# Altium PCB PCB.PcbDoc
Units mil, origin at the board's own origin, x right, y up, seen from the top; angles counter-clockwise.
Board outline 6000 x 4000 mil, 2 copper layers (Top Layer, Bottom Layer); 31 components, 41 nets, 131 pads, 0 vias.
Unrouted connection lines stored in the file: 86.
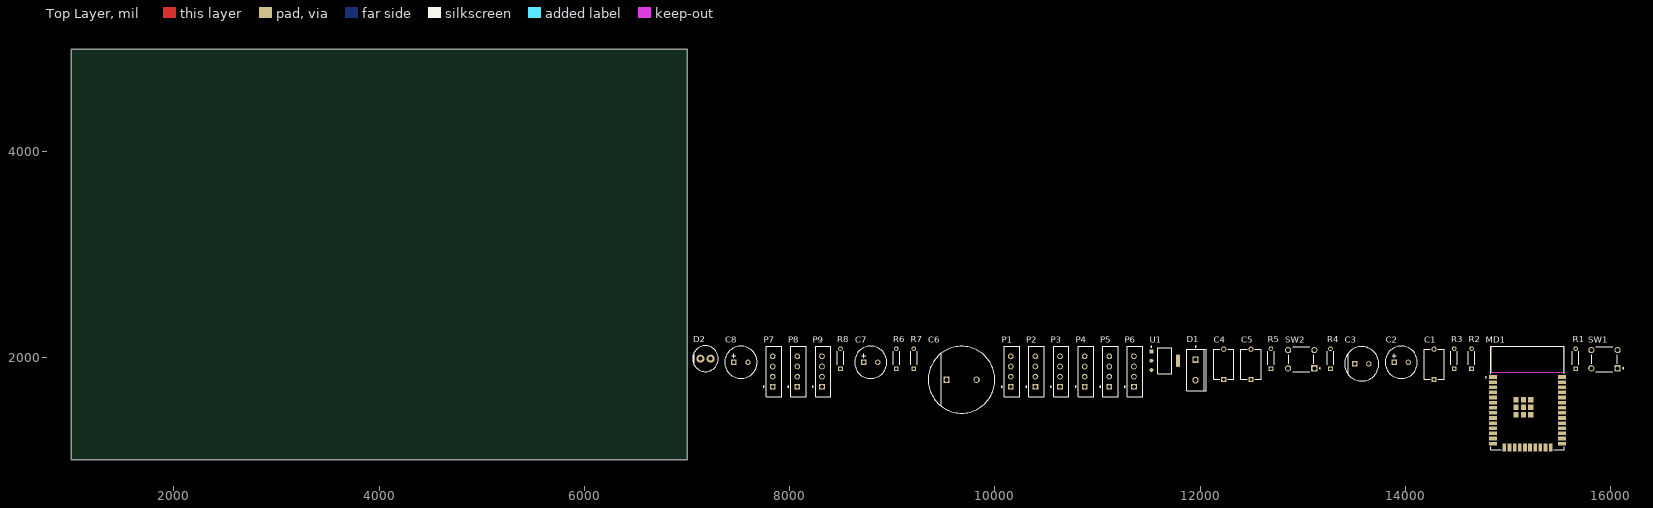
[diagram p0: Top Layer view]
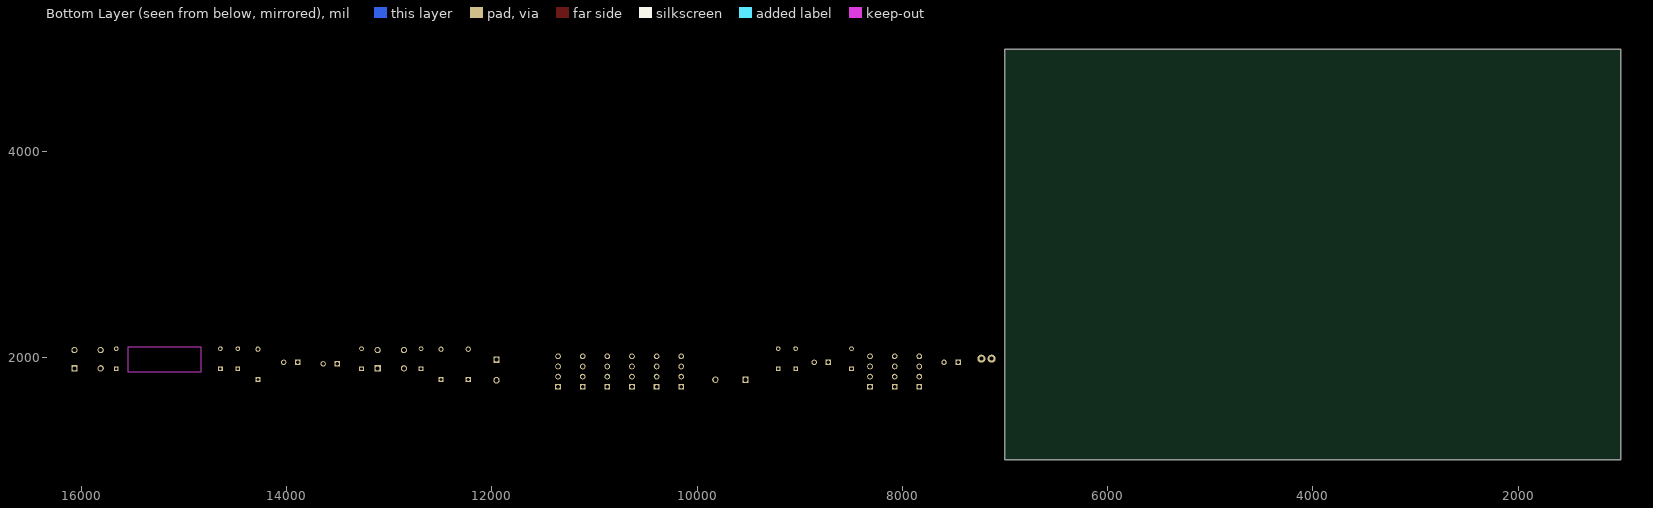
[diagram p1: Bottom Layer view, seen from below]

## Layer stack, top to bottom
Top Solder: solder mask 0.4, Solder Resist, Dk 3.5
Top Layer: signal copper 1.4
Dielectric 1: dielectric 12.6, FR-4, Dk 4.8
Bottom Layer: signal copper 1.4
Bottom Solder: solder mask 0.4, Solder Resist, Dk 3.5

## Board outline
1000,1000 7000,1000 7000,5000 1000,5000

## Design rules (kind name [scope] priority, off if disabled: settings)
Clearance [All] p1: gap=10 ignorepadtopadclearanceinfootprint=FALSE except(0: Arc-Hole Track-Hole SMDPad-Hole THPad-Hole Via-Hole Fill-Hole Poly-Hole Region-Hole Text-Hole)
PolygonConnect [All] p1: connectstyle=Relief reliefconductorwidth=10 reliefentries=4 polygonreliefangle="90 Angle" airgapwidth=10
RoomDefinition MCU [InComponentClass('MCU')] p1: confinementstyle=ConfineIn formatcopy=TRUE lockcomponents=FALSE outline 7045,1065 16140,1065 16140,2220 7045,2220
RoutingVias [All] p1: holewidth=28 width=50 viastyle="Through Hole" minholewidth=28 minwidth=50 maxholewidth=28 maxwidth=50
SolderMaskExpansion [All] p1: expansion=4 istentingtop=FALSE
Width [All] p1: maxlimit=10 minlimit=10 preferedwidth=10
30 further rules are at their usual default settings.

## Components (designator, comment, footprint, x,y, rotation, side; value= is the part's Value field where it differs from the comment)
C1 "1nF" FP-VY2102M29Y5US6TV7-MFG 14280,1930 r90 top
C2 "100uF" NIC-RNS-8x11.5-2_V 13960,1950 r0 top
C3 "1uF" FP-ECA-2WHG010-MFG 13575,1935 r0 top
C4 "1nF" FP-VY2102M29Y5US6TV7-MFG 12230,1930 r90 top
C5 "1nF" FP-VY2102M29Y5US6TV7-MFG 12495,1930 r90 top
C6 "22uF" FP-RAD-TH-D_16_0_5-L_20_2-MFG 9675,1780 r0 top
C7 "10uF" NIC-RNS-8x11.5-2_V 8790,1950 r0 top
C8 "10uF" NIC-RNS-8x11.5-2_V 7525,1950 r0 top
D1 "BYW80-200G" ONSC-TO-220-2-221B-04_E 11955,1875 r0 top
D2 "SFH 4550" FP-SFH_4550-MFG 7180,1985 r0 top
MD1 "ESP32-WROOM-32D" FP-ESP32-WROOM-32D-MFG 15190,1600 r0 top
P1 "B4B-EH-A(LF)(SN)" JST-B4B-EH-A_V 10155,1860 r90 top
P2 "B4B-EH-A(LF)(SN)" JST-B4B-EH-A_V 10395,1860 r90 top
P3 "B4B-EH-A(LF)(SN)" JST-B4B-EH-A_V 10635,1860 r90 top
P4 "B4B-EH-A(LF)(SN)" JST-B4B-EH-A_V 10875,1860 r90 top
P5 "B4B-EH-A(LF)(SN)" JST-B4B-EH-A_V 11115,1860 r90 top
P6 "B4B-EH-A(LF)(SN)" JST-B4B-EH-A_V 11355,1860 r90 top
P7 "B4B-EH-A(LF)(SN)" JST-B4B-EH-A_V 7835,1860 r90 top
P8 "B4B-EH-A(LF)(SN)" JST-B4B-EH-A_V 8075,1860 r90 top
P9 "B4B-EH-A(LF)(SN)" JST-B4B-EH-A_V 8315,1860 r90 top
R1 "5k" FP-MRS1600-MFG 15660,1985 r90 top
R2 "470Ohm" FP-MRS1600-MFG 14645,1985 r90 top
R3 "5k" FP-MRS1600-MFG 14475,1985 r90 top
R4 "12k" FP-MRS1600-MFG 13270,1985 r90 top
R5 "470Ohm" FP-MRS1600-MFG 12690,1985 r90 top
R6 "2k" FP-MRS1600-MFG 9040,1985 r90 top
R7 "330" FP-MRS1600-MFG 9210,1985 r90 top
R8 "540" FP-MRS1600-MFG 8495,1985 r90 top
SW1 "1-1825910-0" FP-1-1825910-0-MFG 15940,1980 r0 top
SW2 "1-1825910-0" FP-1-1825910-0-MFG 12985,1980 r0 top
U1 "AMS1117-3.3" FP-AMS1117-IPC_C 11655,1965 r0 top

## Footprints (in the part's own frame and the unit in brackets; to place one, negate y for a bottom-side part, rotate by r counter-clockwise, add the part's x,y. Pads: shape width x height; smd on the part's side, far side on the other; paste and mask are expansions set on the pad)
FP-1-1825910-0-MFG [mm]
  rect 1.54x1.54 hole 0.99 paste-1000 mask+0: 1(3.25,-2.25)
  round 1.54 hole 0.99 paste-1000 mask+0: 2(-3.25,-2.25) 3(3.25,2.25) 4(-3.25,2.25)
  silkscreen extent -3.15,-3.15 4.77,3.15, body extent -4.12,-3.24 4.12,3.24, height 0.25
FP-AMS1117-IPC_C [mm]
  rect 1.004x0.872 smd paste+0 mask+0: 1(-3.295,2.29)
  rrect100% 1.004x0.872 smd paste+0 mask+0: 2(-3.295,0) 3(-3.295,-2.29)
  rrect87% 1.004x3.182 smd paste+0 mask+0: 4(3.295,0)
  silkscreen extent -3.42,-3.25 1.75,3.62, body extent -3.9,-3.35 3.9,3.35, height 0.25
FP-ECA-2WHG010-MFG [mm]
  rect 1.3x1.3 hole 0.8 paste-1000 mask+0: 1(-1.75,0)
  round 1.3 hole 0.8 paste-1000 mask+0: 2(1.75,0)
  silkscreen extent -4.25,-4.25 4.25,4.25, body extent -4.35,-4.35 4.35,4.35, height 0.25
FP-ESP32-WROOM-32D-MFG [mm]
  rect 2x0.9 smd paste+0 mask+0: 1(-8.5,5.26) 2(-8.5,3.99) 3(-8.5,2.72) 4(-8.5,1.45) 5(-8.5,0.18) 6(-8.5,-1.09) 7(-8.5,-2.36) 8(-8.5,-3.63) 9(-8.5,-4.9) 10(-8.5,-6.17) 11(-8.5,-7.44) 12(-8.5,-8.71) 13(-8.5,-9.98) 14(-8.5,-11.25) 25(8.5,-11.25) 26(8.5,-9.98) 27(8.5,-8.71) 28(8.5,-7.44) 29(8.5,-6.17) 30(8.5,-4.9) 31(8.5,-3.63) 32(8.5,-2.36) 33(8.5,-1.09) 34(8.5,0.18) 35(8.5,1.45) 36(8.5,2.72) 37(8.5,3.99) 38(8.5,5.26)
  rect 0.9x2 smd paste+0 mask+0: 15(-5.715,-12.25) 16(-4.445,-12.25) 17(-3.175,-12.25) 18(-1.905,-12.25) 19(-0.635,-12.25) 20(0.635,-12.25) 21(1.905,-12.25) 22(3.175,-12.25) 23(4.445,-12.25) 24(5.715,-12.25)
  rect 1.33x1.33 smd paste+0 mask+0: 39(-2.835,-4.075) 39(-2.835,-2.24) 39(-2.835,-0.405) 39(-1,-4.075) 39(-1,-2.24) 39(-1,-0.405) 39(0.835,-4.075) 39(0.835,-2.24) 39(0.835,-0.405)
  Keep-Out Layer region: -9,6.45 9,6.45 9,12.75 -9,12.75
  Keep-Out Layer region: -9,6.45 9,6.45 9,12.75 -9,12.75
  silkscreen extent -10.4,-12.8 9.05,12.8, body extent -9.6,-13.35 9.6,12.9, height 0.25
FP-MRS1600-MFG [mm]
  rect 1.15x1.15 hole 0.65 paste-1000 mask+0: 1(-2.5,0)
  round 1.15 hole 0.65 paste-1000 mask+0: 2(2.5,0)
  silkscreen extent -1.55,-0.8 1.8,0.8, body extent -3.17,-0.9 3.17,0.9, height 0.25
FP-RAD-TH-D_16_0_5-L_20_2-MFG [mm]
  rect 1.55x1.55 hole 1 paste-1000 mask+0: 1(-3.75,0)
  round 1.55 hole 1 paste-1000 mask+0: 2(3.75,0)
  silkscreen extent -8.25,-8.25 8.25,8.25, body extent -8.35,-8.35 8.35,8.35, height 0.25
FP-SFH_4550-MFG [mm]
  round 2 hole 1 paste-1000 mask+0: 1(-1.27,0) 2(1.27,0)
  silkscreen extent -3.2,-3.2 3.2,3.2, body extent -3.05,-3.05 3.05,3.05, height 0.25
FP-VY2102M29Y5US6TV7-MFG [mm]
  rect 1.3x1.3 hole 0.8 paste-1000 mask+0: 1(-3.75,0)
  round 1.3 hole 0.8 paste-1000 mask+0: 2(3.75,0)
  silkscreen extent -3.75,-2.5 3.75,2.5, body extent -4.5,-2.6 4.5,2.6, height 0.25
JST-B4B-EH-A_V [mm] "Header, 4-Leads, Body 12.5x3.8mm, Pitch 2.5mm"
  rect 1.4x1.4 hole 0.9: 1(-3.75,0)
  round 1.4 hole 0.9: 2(-1.25,0) 3(1.25,0) 4(3.75,0)
  silkscreen extent -6.25,-2.2 6.25,2.37, body extent -6.25,-2.2 6.25,1.6, height 6
NIC-RNS-8x11.5-2_V [mm] "THD, 2-Leads, Dia 8mm, Body Length 11.5mm, Pin Spacing 3.5mm"
  rect 1.35x1.35 hole 0.85: 1(-1.75,0)
  round 1.35 hole 0.85: 2(1.75,0)
  silkscreen extent -4,-4 4,4, body extent -4,-4 4,4, height 13
ONSC-TO-220-2-221B-04_E [mm] "FM, 2-Leads, Body 10.3x4.85mm, Pitch 5.08mm"
  rect 1.6x1.6 hole 1: 1(0,2.54)
  round 1.6 hole 1: 3(0,-2.54)
  silkscreen extent -2.2,-5.15 2.7,5.92, body extent -2.18,-5.15 2.67,5.15, height 19.05

## Part data
C1 C4 C5: library part CMP-00030-42817980-1, "VY2102M29Y5US6TV7 Cap Ceramic Suppression X1/Y2 0.001uF 440VAC/300VAC Y5U 20% (7.5 X 5mm) Radial 7.5mm 125C T/R", Case/Package=Radial, Dielectric=Y5U, Max Operating Temperature=125°C, Min Operating Temperature=-40°C, Tolerance=20%, Voltage=300V, Voltage Rating=1kV, Capacitance=1nF, Composition=Ceramic, Depth=5mm, Diameter=7.5mm, Height=10.5mm, Height - Seated (Max)=11.5062mm, Lead Diameter=600µm, Lead Free="Lead Free", Lead Pitch=7.5mm, Lead/Base Style=Kinked, Material=Ceramic, Mount="Through Hole", NexarPartId=42817980, Packaging="Tape & Reel (TR)", Radiation Hardening=No, REACH SVHC=Unknown, RoHS=Compliant, Schedule B="8532230060, 8532230060", Termination=Radial, Voltage Rating (AC)=300V
C2 C7 C8: library part CMP-1235-00001-1, "Aluminum Electrolytic Capacitor, 100 uF +/-20%, 10 V, -55 to 105 degC, 2-Pin THD, RoHS", Capacitance Tolerance=+/-20%, Leakage Current="0.15 mA", Manufacturer=Nichicon, PartNumber=RNS1A101MDN1KX, Rated Capacitance="100 uF", Rated Voltage="10 V", Temperature Range="-55 to 105 degC", ComponentLink1Description="Manufacturer URL", ComponentLink1URL=http://www.nichicon.co.jp/, ComponentLink2Description=Datasheet, ComponentLink2URL=http://www.nichicon.co.jp/english/products/pdfs/e-ns.pdf, ComponentLink3Description="Package Specification", ComponentLink3URL=http://www.nichicon.co.jp/english/products/pdf/2013fpcap_catalog_ns.pdf, DatasheetVersion=Sep-13, Mounting Technology="Through Hole", PackageDescription="2-Pin Through Hole Device, Dia 8 mm, Body Length 11.5 mm, Pin Spacing 3.5 mm", Rated Ripple="3900 mA", RoHS=TRUE
C3: library part CMP-00287-55558411-1, "ECA-2WHG010 Aluminum Electrolytic Capacitor, 1 uF, 450 V, ± 20%, 2000 hours @ 105°C, Radial Leaded", Capacitance=1µF, Case/Package=Radial, Dielectric Material=Aluminium, Max Operating Temperature=105°C, Min Operating Temperature=-25°C, Ripple Current=18mA, Tolerance=20%, Voltage=450V, Contact Plating=Tin, Diameter=8mm, Dissipation Factor=0.24%, Height=11.5mm, Height - Seated (Max)=12.4968mm, Lead Diameter=600µm, Lead Free="Lead Free", Lead Pitch=3.5mm, Lead/Base Style=Straight, Length=11.5mm, Life (Hours)=2000hours, Mount="PCB, Through Hole", NexarPartId=55558411, Number of Pins=2, Packaging=Bulk, Radiation Hardening=No, REACH SVHC="No SVHC", RoHS=Compliant, Schedule B="8532220020, 8532220020", Termination=Radial, Voltage Rating=450V, Voltage Rating (AC)=450V, Voltage Rating (DC)=450V, Width=8mm
C6: library part CMP-05427-000893-1, "Aluminum Electrolytic Capacitors (Radial Lead Type) 22uF ±20% 450V", Case/Package=Radial, Dielectric Material=Aluminium, Leakage Current=604uA, Max Operating Temperature=105°C, Min Operating Temperature=-25°C, Package Quantity=100, Ripple Current=945mA, Tolerance=20%, Voltage=450V, Capacitance=22uF, Construction=RADIAL, Contact Plating=Tin, Diameter=16mm, Dissipation Factor=0.24%, Height=20mm, Height - Seated (Max)=0.787inch, Lead Diameter=0.8mm, Lead Free="Lead Free", Lead Pitch=7.5mm, Length=20mm, Life (Hours)=10000Hour, Mount="Through Hole", Packaging=Bulk, Radiation Hardening=No, REACH SVHC="No SVHC", RoHS Compliant=Yes, Series=EE, Termination=Radial, Voltage Rating=450V, Voltage Rating (DC)=450V
D1: library part CMP-0902-00381-1, "SWITCHMODE(TM) Power Rectifier, 2-Pin TO-220, Pb-Free, Tube", Manufacturer="On Semiconductor", ComponentLink1Description="Manufacturer URL", ComponentLink1URL=http://www.onsemi.com/, ComponentLink2Description=Datasheet, ComponentLink2URL=http://www.onsemi.com/pub_link/Collateral/BYW80-D.PDF, ComponentLink3Description="Package Specification", ComponentLink3URL=http://www.onsemi.com/pub_link/Collateral/BYW29-D.PDF, DatasheetVersion="Rev. 3", IFSM Max (A)=100, Mounting Technology="Through Hole", PackageDescription="2-Pin Flange Mount, Vertical Straight Lead, Body 9.97 x 4.44 mm, Pitch 5.08 mm", PackageReference=TO-220-2-221B-04_E, PackageVersion="Rev. E", Packing=Tube, PartNumber=BYW80-200G, RoHS=TRUE, Type=Ultrafast, VRRM Max (V)=200
D2: library part CMP-62016-000011-1, "EMITTER IR 860NM 100MA RADIAL", Colour=Infrared, Forward Current=100mA, Forward Voltage=1.5V, Manufacturer="Osram Opto", Reverse Voltage=5V, Temperature="-40°C to +100°C", Temperature Range High=+100°C, Temperature Range Low=-40°C, Automotive=No, Category=Diode, ComponentLink2Description=Datasheet, ComponentLink2URL=https://dammedia.osram.info/media/resource/hires/osram-dam-5580407/SFH%204550_EN.pdf, Device Class L1=Optoelectronics, Device Class L2=LEDs, Device Class L3=unset, Digikey Description="EMITTER IR 860NM 100MA RADIAL", Lead Free=Yes, Led Orientation=Straight, Manufacturer Part Number="SFH 4550", Mouser Description="Infrared Emitters - High Power Infrared 850 nm HALF ANGLE +/-3DEG", Octopart=https://octopart.com/sfh+4550-osram+opto-55410894, Package="SFH 4550", Peak Emmision Wavelength=860nm, RoHS=TRUE, Viewing Angle=6°
MD1: library part CMP-194065-000003-1, "WIFI MODULE 32MBITS SPI FLASH", Manufacturer="Espressif Systems", Max Frequency=2484MHz, Max Supply Voltage=3.6V, Min Supply Voltage=3V, Nominal Supply Current=500mA, Temperature="-40°C to +85°C", Temperature Range High=+85°C, Temperature Range Low=-40°C, Automotive=No, Bandwidth=72MHz, Category=UNK, ComponentLink2Description=Datasheet, ComponentLink2URL=https://www.espressif.com/sites/default/files/documentation/esp32-wroom-32d_esp32-wroom-32u_datasheet_en.pdf, Data Rate=150Mbits/s, Device Class L1="Integrated Circuits (ICs)", Device Class L2="RF Semiconductors and Devices", Device Class L3=Transceivers, Digikey Description="WIFI MODULE 32MBITS SPI FLASH", Height=3.2mm, Interface=I2C,SPI,UART,Ethernet,I2S,Other, Lead Free=Yes, Manufacturer Part Number=ESP32-WROOM-32D, Mouser Description="Wi-Fi/BT BLE Module ESP32-D0WD, SPI Flash, UART, P", Number Of Adc Channels=16, Number Of Gpio=32, Octopart=https://octopart.com/esp32-wroom-32d-espressif+systems-91040050, Package=ESP32-WROOM-32D, RoHS=TRUE, Sensitivity=-98dBm
P1 P2 P3 P4 P5 P6 P7 P8 P9: library part CMP-2000-05904-1, "Male Header, Pitch 2.5 mm, 1 x 4 Position, Height 6 mm, Tail Length 3.2 mm, -25 to 85 degC, RoHS, Bulk", Manufacturer=JST, Package Description="Male Header, Pitch 2.5 mm, 1 x 4 Position, Height 6 mm, Tail Length 3.2 mm", Package Reference=B4B-EH-A, Datasheet URL=http://www.jst-mfg.com/product/pdf/eng/eEH.pdf, Datasheet Version=12/2012, Manufacturer URL=http://www.jst.com/home2.html, Mounting Technology=SurfaceMount, No of Positions=4, Pitch=2.5mm, Style/Orientation=StraightHeader/Plug, Termination=Crimp, Type=ShroudedHeader
R1 R2 R3 R4 R5 R6 R7 R8: library part CMP-02408-000019-1, "RES 20K OHM 0.4W 1% AXIAL", Case/Package=Conformal, Max Operating Temperature=155°C, Max Power Dissipation=400mW, Min Operating Temperature=-55°C, Resistance=20kR, Resistor Type="Metal Film", Temperature Coefficient=50ppm/°C, Tolerance=1%, Construction=Cylindrical, Contact Plating=Tin, Diameter=1.6mm, Length=3.6mm, Military Standard=Not, Mount="Through Hole", Number of Terminations=2, Packaging="Tape and Reel", Power Rating=400mW, Radiation Hardening=No, RoHS Compliant=Yes, Series=MRS16, Technology="THIN FILM", Termination=Axial
SW1 SW2: library part CMP-03407-000018-1, "SWITCH TACTILE SPST-NO 0.05A 24V", Actuator Color=Blue, Contact Current Rating=50mA, Contact Resistance=100mR, Max Operating Temperature=85°C, Max Voltage Rating (DC)=24V, Min Operating Temperature=-35°C, Operating Force=1.56N, Package Quantity=750, Actuator Length=3.4mm, Actuator Material=Nylon, Actuator Type=Standard, Contact Material=Brass, Contact Plating=Silver, Depth=5.99mm, Electrical Life=100000Cycles, Illumination Type=Non-Illuminated, Length=5.99mm, Max Current Rating=50mA, Mechanical Life=100000Cycles, Mount="Through Hole", Orientation=Straight, Packaging="Loose Piece", Radiation Hardening=No, RoHS Compliant=Yes, Series="FSMJ, Alcoswitch", Switch Function=Off-Mom, Switch Travel=0.25mm, Termination="PC Pins", Throw Configuration=SPST, Type=Switch, Voltage Rating (DC)=24V
U1: library part CMP-209535-000001-1, "LDO Voltage Regulators 1A, 3.3V", Dropout Voltage=1.1V, Manufacturer="Advanced Monolithic Systems", Max Junction Temp=+125°C, Max Power Dissipation=1.2W, Max Supply Voltage=15V, Nominal Supply Current=5mA, Output Current=1A, Output Voltage=3.3V, Package=AMS1117, Temperature="-40°C to +125°C", Temperature Range Low=-40°C, Automotive=No, Category=IC, ComponentLink2Description=Datasheet, ComponentLink2URL=http://www.advanced-monolithic.com/pdf/ds1117.pdf, Device Class L1="Integrated Circuits (ICs)", Device Class L2="Power Management ICs", Device Class L3="Voltage Regulators - Linear", Height=1.8mm, Ipc Land Pattern Name=SOT229P700X180-4, Lead Free=Yes, Manufacturer Part Number=AMS1117-3.3, Number Of Outputs=1, Octopart=https://octopart.com/ams1117-3.3-advanced+monolithic+systems-25899300, Output Type=Fixed, RoHS=TRUE, Standoff Height=0.64mm, Temperature Range High=+125°C

## Nets (pads, with @x,y where several pads share a name; then routed paths per layer and width w, separated by ;. In a path a pad name is that pad's centre, name@x,y a point inside that pad or via, vN(x,y) a via of type N, cw(c..) or ccw(c..) an arc to the next point about the centre after c; other vN are vias at no path point)
+3.3v: C2.1 C3.2 C6.2 D1.3 MD1.2 P8.1 P8.2 P8.3 P8.4 R1.2 R4.2 R7.2 U1.2 U1.4
+5v: C7.1 D1.1 P9.1 P9.2 P9.3 P9.4 R6.2 U1.3
CLK: MD1.20
CMD: MD1.19
EN: C5.1 MD1.3 P2.4 R4.1 R5.1
GND: C1.1 C2.2 C3.1 C4.1 C5.2 C6.1 C7.2 C8.2 D2.1 MD1.1 MD1.15 MD1.38 MD1.39 P1.3 P1.4 P7.1 P7.2 P7.3 P7.4 R3.2 R8.1 SW1.2 SW2.2
IO0: MD1.25 R1.1 R2.1
IO2: MD1.24 R3.1
IO4: MD1.26 P3.1
IO5: MD1.29
IO12: MD1.14
IO13: MD1.16 P2.3
IO14: MD1.13 P2.2
IO15: MD1.23
IO16: MD1.27 P2.1
IO17: MD1.28 P3.4
IO18: MD1.30 P3.3
IO19: MD1.31 P3.2
IO21: MD1.33 P5.1 P5.2 P5.3 P5.4
IO22: MD1.36 P6.1 P6.2 P6.3 P6.4
IO23: MD1.37 P4.4
IO25: MD1.10 P4.3
IO26: MD1.11 P4.2
IO27: MD1.12 P4.1
IO32: MD1.8
IO33: MD1.9
IO34: MD1.6
IO35: MD1.7
NC: MD1.32
NetC1_2: C1.2 R2.2 SW1.4
NetC4_2: C4.2 R5.2 SW2.4
NetC8_1: C8.1 R7.1 R8.2 U1.1
NetD2_2: D2.2 R6.1
RX: MD1.34 P1.1
SD0: MD1.21
SD1: MD1.22
SD2: MD1.17
SD3: MD1.18
SENSOR_VN: MD1.5
SENSOR_VP: MD1.4
TX: MD1.35 P1.2
pads on no net: SW1.1 SW1.3 SW2.1 SW2.3